# Altium PCB SDR_V2.PcbDoc (part 1 of 2)
Units mil, origin at the board's own origin, x right, y up, seen from the top; angles counter-clockwise.
Board outline 6000 x 4000 mil, 2 copper layers (Top Layer, Bottom Layer); 403 components, 321 nets, 1711 pads, 0 vias.
Unrouted connection lines stored in the file: 1226.
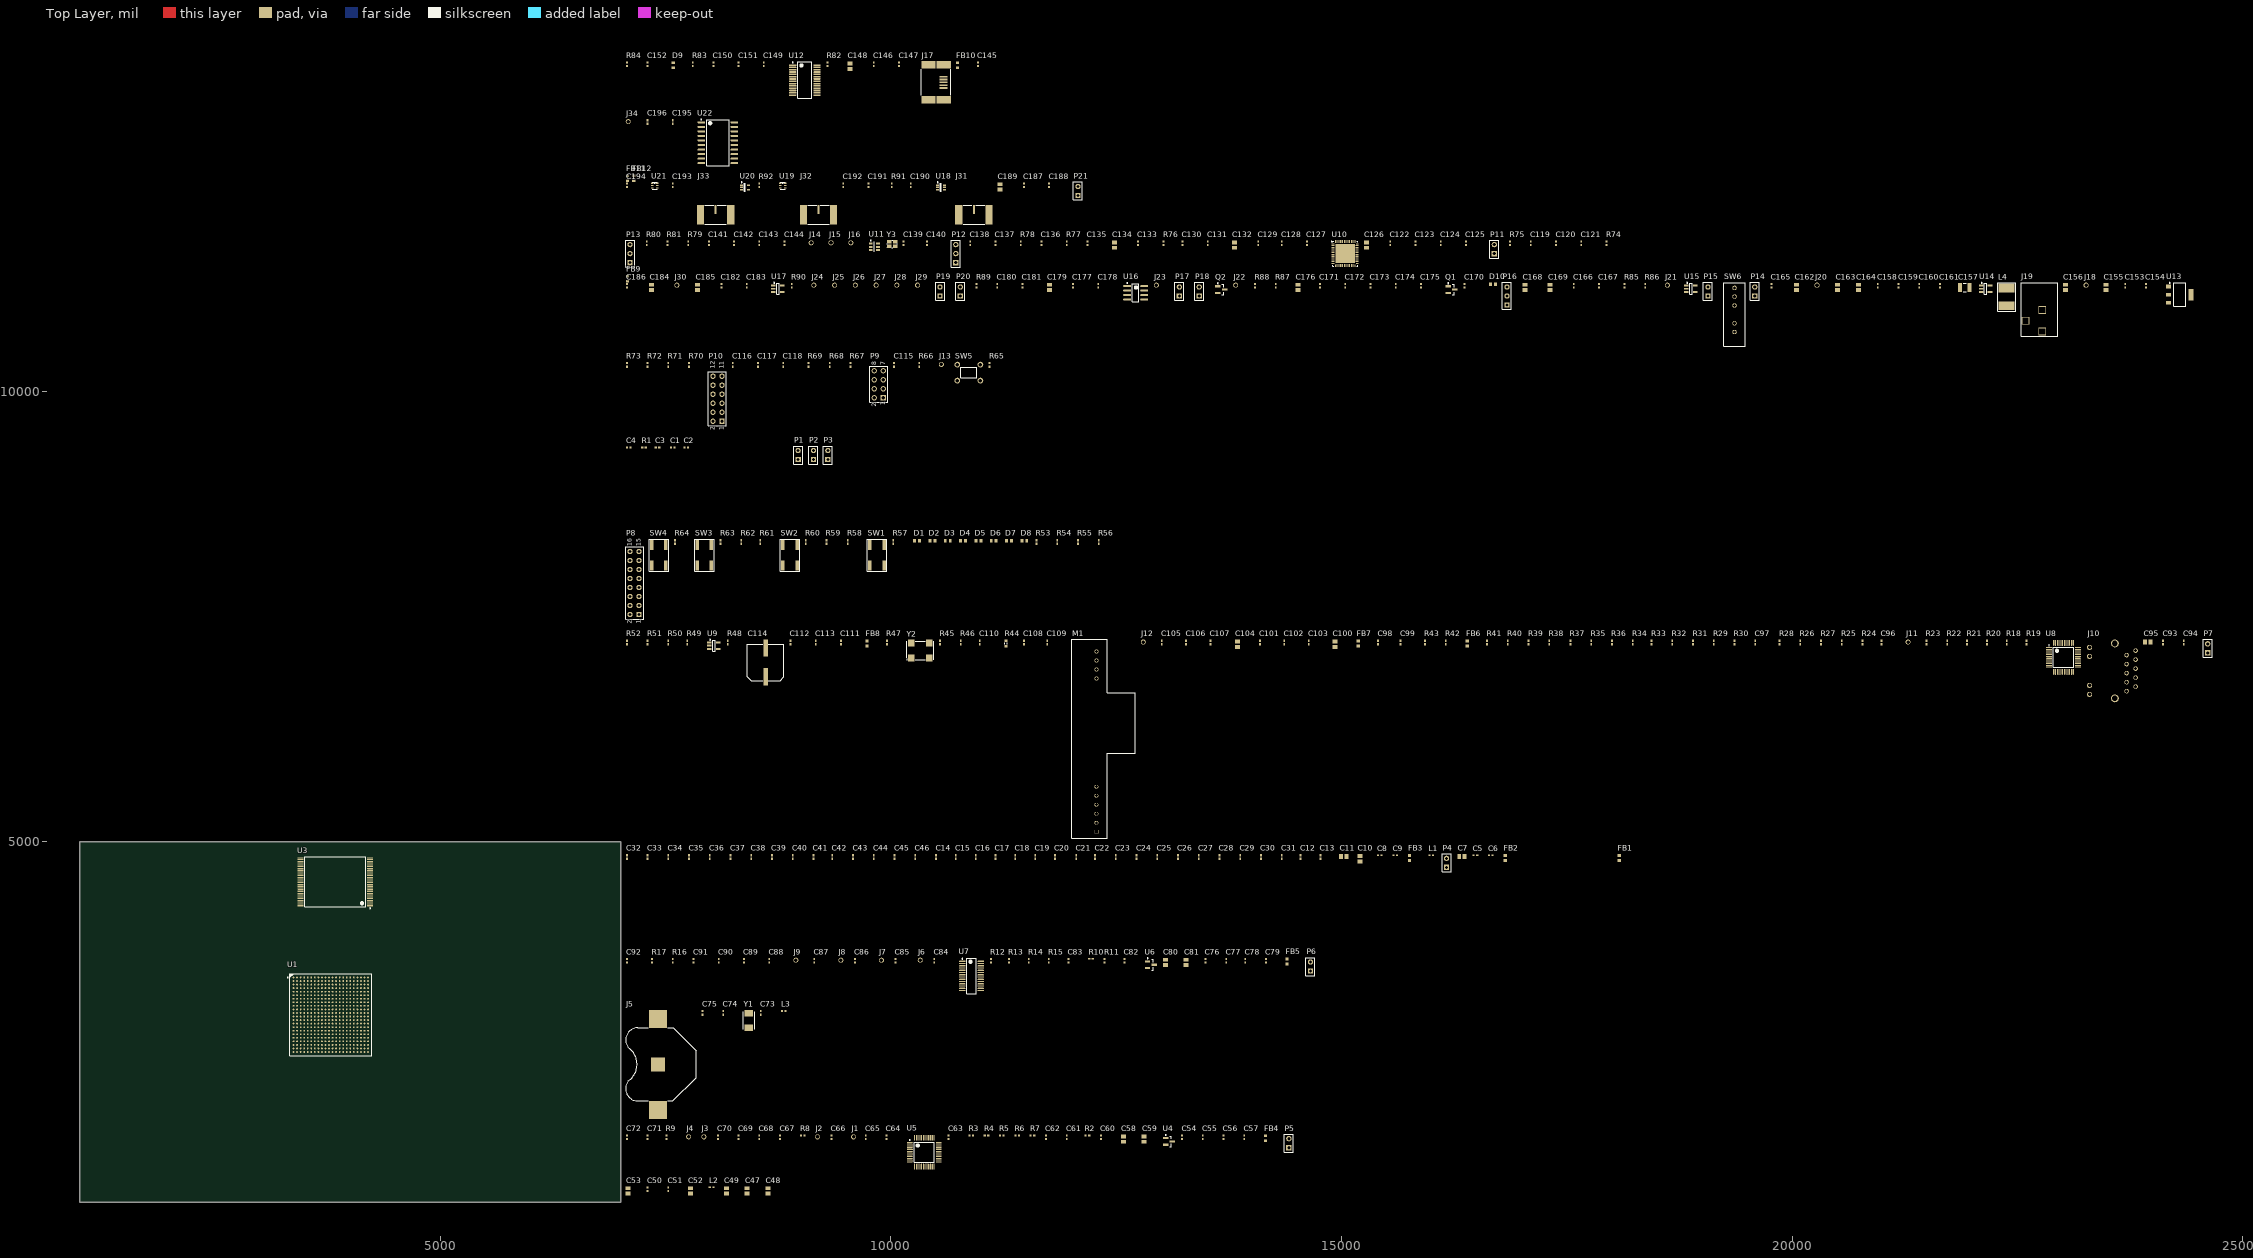
[diagram p0: Top Layer view]
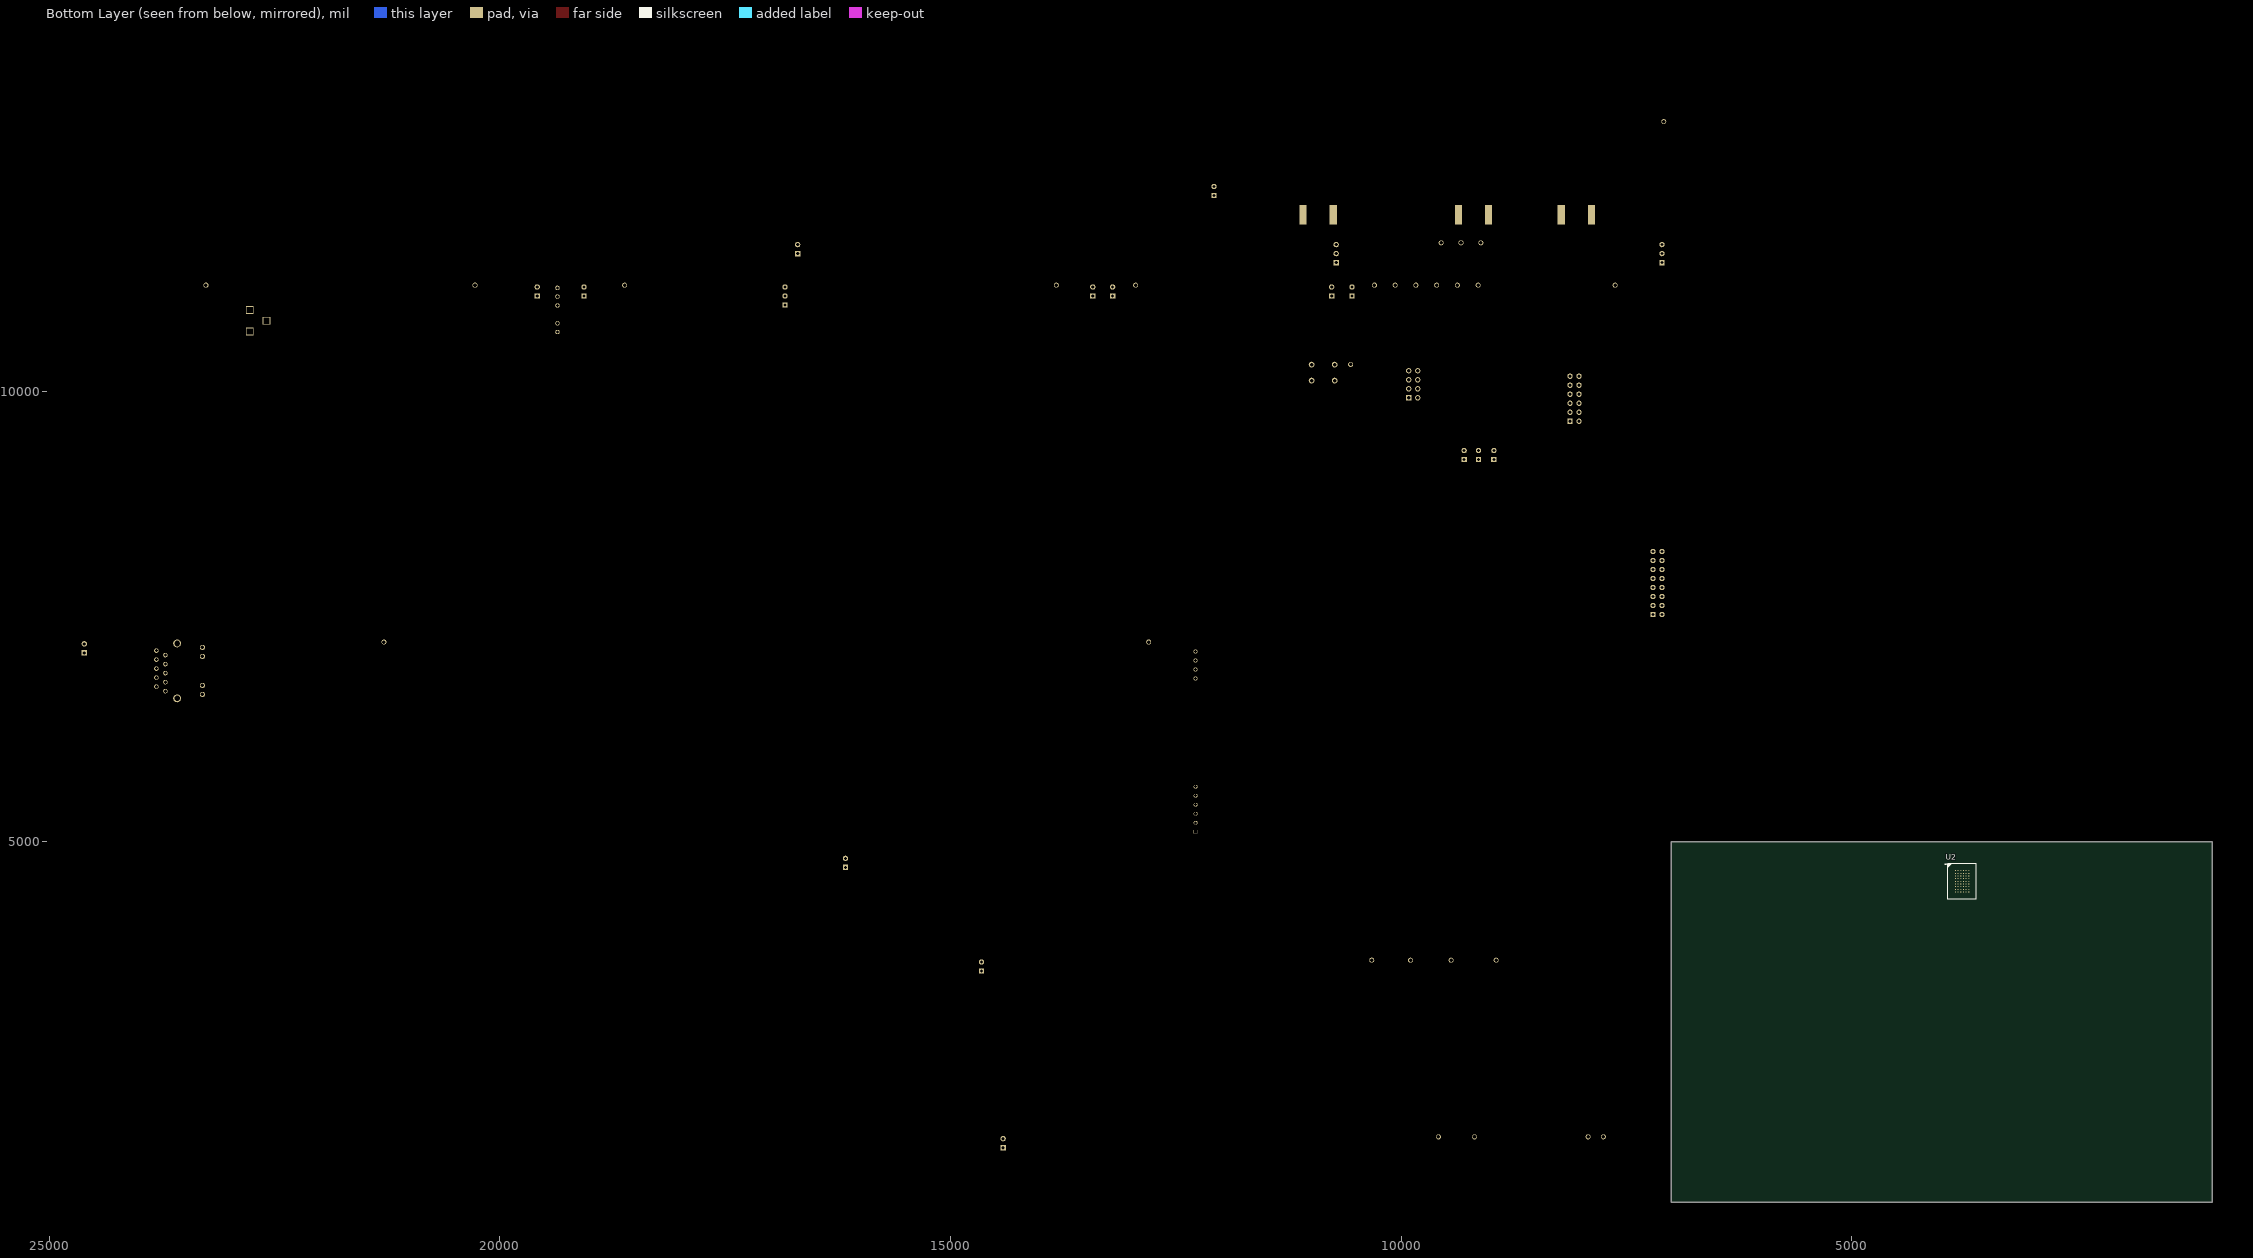
[diagram p1: Bottom Layer view, seen from below]

## Layer stack, top to bottom
Top Layer: signal copper 1.4
Dielectric: dielectric 12.6, FR-4, Dk 4.8
Bottom Layer: signal copper 1.4

## Board outline
1000,1000 7000,1000 7000,5000 1000,5000

## Design rules (kind name [scope] priority, off if disabled: settings)
Clearance [All] p1: gap=10
DiffPairsRouting [All] p1: maxlimit=10 minlimit=10 mostfreqgap=10 maxuncoupledlength=500
PolygonConnect [All] p1: connectstyle=Relief reliefconductorwidth=10 reliefentries=4 polygonreliefangle="90 Angle"
RoomDefinition U_usb_uart [InComponentClass('U_usb_uart')] p1: confinementstyle=ConfineIn formatcopy=TRUE lockcomponents=FALSE outline 7045,13180 11185,13180 11185,13770 7045,13770
RoomDefinition U_RTC [InComponentClass('U_RTC')] p2: confinementstyle=ConfineIn formatcopy=TRUE lockcomponents=FALSE outline 7045,12480 8325,12480 8325,13130 7045,13130
RoomDefinition U_RF_2 [InComponentClass('U_RF_2')] p3: confinementstyle=ConfineIn formatcopy=TRUE lockcomponents=FALSE outline 7045,11835 12210,11835 12210,12430 7045,12430
RoomDefinition U_RF [InComponentClass('U_RF')] p4: confinementstyle=ConfineIn formatcopy=TRUE lockcomponents=FALSE outline 7045,11365 18110,11365 18110,11785 7045,11785
RoomDefinition U_PWR_Gen [InComponentClass('U_PWR_Gen')] p5: confinementstyle=ConfineIn formatcopy=TRUE lockcomponents=FALSE outline 7045,10485 24465,10485 24465,11315 7045,11315
RoomDefinition U_MSS_IO [InComponentClass('U_MSS_IO')] p6: confinementstyle=ConfineIn formatcopy=TRUE lockcomponents=FALSE outline 7045,9550 11265,9550 11265,10435 7045,10435
RoomDefinition U_MEM [InComponentClass('U_MEM')] p7: confinementstyle=ConfineIn formatcopy=TRUE lockcomponents=FALSE outline 7045,8520 9375,8520 9375,9500 7045,9500
RoomDefinition U_Fabric_IO [InComponentClass('U_Fabric_IO')] p8: confinementstyle=ConfineIn formatcopy=TRUE lockcomponents=FALSE outline 7045,7405 12475,7405 12475,8470 7045,8470
RoomDefinition U_Ethernet [InComponentClass('U_Ethernet')] p9: confinementstyle=ConfineIn formatcopy=TRUE lockcomponents=FALSE outline 7045,5025 24735,5025 24735,7355 7045,7355
RoomDefinition U_Digital_PWR [InComponentClass('U_Digital_PWR')] p10: confinementstyle=ConfineIn formatcopy=TRUE lockcomponents=FALSE outline 7045,3875 18225,3875 18225,4975 7045,4975
RoomDefinition U_DAC [InComponentClass('U_DAC')] p11: confinementstyle=ConfineIn formatcopy=TRUE lockcomponents=FALSE outline 7045,3295 14730,3295 14730,3825 7045,3825
RoomDefinition U_Analog [InComponentClass('U_Analog')] p12: confinementstyle=ConfineIn formatcopy=TRUE lockcomponents=FALSE outline 7045,1915 9935,1915 9935,3245 7045,3245
RoomDefinition U_ADC [InComponentClass('U_ADC')] p13: confinementstyle=ConfineIn formatcopy=TRUE lockcomponents=FALSE outline 7045,1345 14490,1345 14490,1865 7045,1865
RoomDefinition U_ACE [InComponentClass('U_ACE')] p14: confinementstyle=ConfineIn formatcopy=TRUE lockcomponents=FALSE outline 7045,1060 8790,1060 8790,1290 7045,1290
RoutingVias [All] p1: holewidth=28 width=50 viastyle="Through Hole" minholewidth=28 minwidth=50 maxholewidth=28 maxwidth=50
SilkscreenOverComponentPads [All] p1: minsilkscreentomaskgap=10
SolderMaskExpansion [All] p1: expansion=4
Width [All] p1: maxlimit=10 minlimit=10 preferedwidth=10
26 further rules are at their usual default settings.

## Classes and differential pairs
component class U_ACE: C47 C48 C49 C51 C52 C53 C76 L2
component class U_ADC: C47 C48 C55 C56 C57 C61 C80 C81 C114 C141 C142 C143 C156 C157 C158 C159 C160 C161 C162 FB4 J1 J2 J3 J4 P5 R2 R3 R4 R5 R6 R7 R8 R9 U5
component class U_Analog: C47 C48 C49 J13 L2 Y1
component class U_DAC: C51 C52 C53 C61 C76 C80 C84 C88 C92 C114 C141 C143 C156 C157 C159 C160 C161 FB6 J7 J8 J9 J17 P1 R10 R11 R12 R13 R14 R15 R16 R20 U9 U13
component class U_Digital_PWR: C5 C6 C7 C8 C9 C10 C11 C12 C13 C14 C15 C16 C17 C18 C19 C20 C21 C22 C23 C24 C25 C26 C27 C28 C29 C30 C31 C32 C33 C34 C35 C36 C37 C38 C39 C40 C41 C42 C43 C44 C45 C46 FB1 FB2 FB3 L1 P4 U1
component class U_Ethernet: C47 C48 C49 C62 C84 C88 C92 C99 C103 C107 C109 C110 C111 C112 C113 C114 C143 C156 C159 C160 C163 C164 FB6 FB7 FB8 J9 J11 J12 M1 P7 R18 R19 R20 R21 R22 R23 R24 R25 R26 R27 R28 R29 R30 R31 R32 R33 R34 R35 R36 R37 R38 R39 R40 R41 R43 R46 R47 R51 R52 R55 R59 R60 R61 R64 R67 U9 Y2
component class U_Fabric_IO: D2 D3 D4 D5 D6 D7 D8 D10 P8 R9 R53 R55 R59 R60 R61 R63 R64 R65 R67 R68 R70 SW1 SW2 SW3 SW4
component class U_MEM: C1 C2 C3 C4 P2 P3 P8 R1 U2 U3
component class U_MSS_IO: C88 C103 C115 C159 J13 P7 P9 R9 R52 R65 R67 R68 R70 R71 R80 R83 SW5
component class U_PWR_Gen: C122 C123 C139 C141 C142 C143 C156 C157 C158 C159 C160 C161 C162 C163 C164 C166 C167 C168 C169 C170 C171 C172 C173 C174 C175 C176 C177 C178 C179 C180 C181 C183 C184 C187 D10 FB6 FB10 J18 J19 J20 J21 J22 J23 J24 J25 J26 J27 J28 J29 J30 L2 P14 P15 P16 P17 P18 P19 P20 Q1 Q2 R85 R86 R87 R88 R89 R90 SW6 U9 U13 U15 U16 U17
component class U_RF_2: C126 C187 C188 C190 C191 C192 C193 C194 FB11 FB12 J31 J32 J33 P11 R91 R92 U12 U18 U20 U21
component class U_RF: C92 C99 C103 C107 C111 C115 C119 C122 C123 C126 C127 C130 C131 C132 C133 C135 C136 C137 C138 C139 C140 C141 C142 C143 C144 C172 FB11 FB12 J13 J15 J16 P12 P13 P15 R20 R46 R74 R76 R79 R80 R83 R84 U13 U15 Y2
component class U_RTC: C195 C196 J34 U21
component class U_usb_uart: C119 C135 C139 C140 C145 C146 C149 C150 D8 FB10 J17 R59 R83 R84 U12
net class ADC_A[0..7]: ADC_A0 ADC_A1 ADC_A2 ADC_A3 ADC_A4 ADC_A5 ADC_A6 ADC_A7
net class ADC_B[0..7]: ADC_B0 ADC_B1 ADC_B2 ADC_B3 ADC_B4 ADC_B5 ADC_B6 ADC_B7
net class B[1..7]: B1 B2 B3 B4 B5 B6 B7
net class DAC_D[0..7]: DAC_D0 DAC_D1 DAC_D2 DAC_D3 DAC_D4 DAC_D5 DAC_D6 DAC_D7
net class EMC_AB[23..1]: EMC_AB1 EMC_AB2 EMC_AB3 EMC_AB4 EMC_AB5 EMC_AB6 EMC_AB7 EMC_AB8 EMC_AB9 EMC_AB10 EMC_AB11 EMC_AB12 EMC_AB13 EMC_AB14 EMC_AB15 EMC_AB16 EMC_AB17 EMC_AB18 EMC_AB19 EMC_AB20 EMC_AB21 EMC_AB22 EMC_AB23
net class EMC_DB[15..0]: EMC_DB0 EMC_DB1 EMC_DB2 EMC_DB3 EMC_DB4 EMC_DB5 EMC_DB6 EMC_DB7 EMC_DB8 EMC_DB9 EMC_DB10 EMC_DB11 EMC_DB12 EMC_DB13 EMC_DB14 EMC_DB15
differential pair ADC_RX_I_BIAS: +ADC_RX_I_BIAS_P -ADC_RX_I_BIAS_N
differential pair ADC_RX_I: +ADC_RX_I_P -ADC_RX_I_N
differential pair ADC_RX_Q_BIAS: +ADC_RX_Q_BIAS_P -ADC_RX_Q_BIAS_N
differential pair ADC_RX_Q: +ADC_RX_Q_P -ADC_RX_Q_N
differential pair RD: +RD_P -RD_N
differential pair RF_TX_I_BIAS: +RF_TX_I_BIAS_P -RF_TX_I_BIAS_N
differential pair RF_TX_I: +RF_TX_I_P -RF_TX_I_N
differential pair RF_TX_Q_BIAS: +RF_TX_Q_BIAS_P -RF_TX_Q_BIAS_N
differential pair RF_TX_Q: +RF_TX_Q_P -RF_TX_Q_N
differential pair RXRF: +RXRF_P -RXRF_N
differential pair TD: +TD_P -TD_N
differential pair TXRF_C: +TXRF_C_P -TXRF_C_N
differential pair TXRF: +TXRF_P -TXRF_N
differential pair USB_D: +USB_D_P -USB_D_N

## Components (designator, comment, footprint, x,y, rotation, side; value= is the part's Value field where it differs from the comment)
C1 "Cap Semi" 0402 7580,9375 r0 top
C2 "Cap Semi" 0402 7730,9375 r0 top
C3 "Cap Semi" 0402 7410,9375 r0 top
C4 "Cap Semi" 0402 7090,9375 r0 top
C5 "Cap Semi" 0402 16485,4850 r0 top
C6 "Cap Semi" 0402 16655,4850 r0 top
C7 "Cap Pol3" C0805 16335,4835 r0 top
C8 "Cap Semi" 0402 15425,4850 r0 top
C9 "Cap Semi" 0402 15595,4850 r0 top
C10 "Cap Pol3" C0805 15205,4810 r90 top
C11 "Cap Pol3" C0805 15025,4835 r0 top
C12 "Cap Semi" 0402 14545,4830 r90 top
C13 "Cap Semi" 0402 14765,4830 r90 top
C14 "Cap Semi" 0402 10500,4830 r90 top
C15 "Cap Semi" 0402 10720,4830 r90 top
C16 "Cap Semi" 0402 10940,4830 r90 top
C17 "Cap Semi" 0402 11160,4830 r90 top
C18 "Cap Semi" 0402 11380,4830 r90 top
C19 "Cap Semi" 0402 11600,4830 r90 top
C20 "Cap Semi" 0402 11820,4830 r90 top
C21 "Cap Semi" 0402 12055,4830 r90 top
C22 "Cap Semi" 0402 12265,4830 r90 top
C23 "Cap Semi" 0402 12495,4830 r90 top
C24 "Cap Semi" 0402 12725,4830 r90 top
C25 "Cap Semi" 0402 12955,4830 r90 top
C26 "Cap Semi" 0402 13185,4830 r90 top
C27 "Cap Semi" 0402 13415,4830 r90 top
C28 "Cap Semi" 0402 13645,4830 r90 top
C29 "Cap Semi" 0402 13875,4830 r90 top
C30 "Cap Semi" 0402 14105,4830 r90 top
C31 "Cap Semi" 0402 14335,4830 r90 top
C32 "Cap Semi" 0402 7070,4830 r90 top
C33 "Cap Semi" 0402 7300,4830 r90 top
C34 "Cap Semi" 0402 7530,4830 r90 top
C35 "Cap Semi" 0402 7760,4830 r90 top
C36 "Cap Semi" 0402 7990,4830 r90 top
C37 "Cap Semi" 0402 8220,4830 r90 top
C38 "Cap Semi" 0402 8450,4830 r90 top
C39 "Cap Semi" 0402 8680,4830 r90 top
C40 "Cap Semi" 0402 8910,4830 r90 top
C41 "Cap Semi" 0402 9140,4830 r90 top
C42 "Cap Semi" 0402 9350,4830 r90 top
C43 "Cap Semi" 0402 9580,4830 r90 top
C44 "Cap Semi" 0402 9810,4830 r90 top
C45 "Cap Semi" 0402 10040,4830 r90 top
C46 "Cap Semi" 0402 10270,4830 r90 top
C47 "Cap Pol3" C0805 8405,1125 r90 top
C48 "Cap Pol3" C0805 8635,1125 r90 top
C49 "Cap Pol3" C0805 8175,1125 r90 top
C50 "Cap Semi" 0402 7300,1145 r90 top
C51 "Cap Semi" 0402 7530,1145 r90 top
C52 "Cap Pol3" C0805 7775,1125 r90 top
C53 "Cap Pol3" C0805 7085,1125 r90 top
C54 "Cap Semi" 0402 13230,1720 r90 top
C55 "Cap Semi" 0402 13460,1720 r90 top
C56 "Cap Semi" 0402 13690,1720 r90 top
C57 "Cap Semi" 0402 13920,1720 r90 top
C58 "Cap Pol3" C0805 12580,1700 r90 top
C59 "Cap Pol3" C0805 12810,1700 r90 top
C60 "Cap Semi" 0402 12330,1720 r90 top
C61 "Cap Semi" 0402 11950,1720 r90 top
C62 "Cap Semi" 0402 11720,1720 r90 top
C63 "Cap Semi" 0402 10640,1720 r90 top
C64 "Cap Semi" 0402 9950,1720 r90 top
C65 "Cap Semi" 0402 9720,1720 r90 top
C66 "Cap Semi" 0402 9340,1720 r90 top
C67 "Cap Semi" 0402 8770,1720 r90 top
C68 "Cap Semi" 0402 8540,1720 r90 top
C69 "Cap Semi" 0402 8310,1720 r90 top
C70 "Cap Semi" 0402 8080,1720 r90 top
C71 "Cap Semi" 0402 7300,1720 r90 top
C72 "Cap Semi" 0402 7070,1720 r90 top
C73 "Cap Semi" 0402 8555,3100 r90 top
C74 "Cap Semi" 0402 8140,3100 r90 top
C75 "Cap Semi" 0402 7910,3100 r90 top
C76 "Cap Semi" 0402 13490,3680 r90 top
C77 "Cap Semi" 0402 13720,3680 r90 top
C78 "Cap Semi" 0402 13930,3680 r90 top
C79 "Cap Semi" 0402 14160,3680 r90 top
C80 "Cap Pol3" C0805 13045,3660 r90 top
C81 "Cap Pol3" C0805 13275,3660 r90 top
C82 "Cap Semi" 0402 12590,3680 r90 top
C83 "Cap Semi" 0402 11970,3680 r90 top
C84 "Cap Semi" 0402 10480,3680 r90 top
C85 "Cap Semi" 0402 10050,3680 r90 top
C86 "Cap Semi" 0402 9600,3680 r90 top
C87 "Cap Semi" 0402 9150,3680 r90 top
C88 "Cap Semi" 0402 8650,3680 r90 top
C89 "Cap Semi" 0402 8370,3680 r90 top
C90 "Cap Semi" 0402 8090,3680 r90 top
C91 "Cap Semi" 0402 7810,3680 r90 top
C92 "Cap Semi" 0402 7070,3680 r90 top
C93 "Cap Semi" 0402 24115,7210 r90 top
C94 "Cap Semi" 0402 24345,7210 r90 top
C95 "Cap Pol3" C0805 23945,7215 r0 top
C96 "Cap Semi" 0402 20990,7210 r90 top
C97 "Cap Semi" 0402 19590,7210 r90 top
C98 "Cap Semi" 0402 15405,7210 r90 top
C99 "Cap Semi" 0402 15655,7210 r90 top
C100 "Cap Pol3" C0805 14925,7190 r90 top
C101 "Cap Semi" 0402 14095,7210 r90 top
C102 "Cap Semi" 0402 14365,7210 r90 top
C103 "Cap Semi" 0402 14635,7210 r90 top
C104 "Cap Pol3" C0805 13845,7190 r90 top
C105 "Cap Semi" 0402 13005,7210 r90 top
C106 "Cap Semi" 0402 13275,7210 r90 top
C107 "Cap Semi" 0402 13545,7210 r90 top
C108 "Cap Semi" 0402 11475,7210 r90 top
C109 "Cap Semi" 0402 11735,7210 r90 top
C110 "Cap Semi" 0402 10985,7210 r90 top
C111 "Cap Semi" 0402 9445,7210 r90 top
C112 "Cap Semi" 0402 8885,7210 r90 top
C113 "Cap Semi" 0402 9165,7210 r90 top
C114 "Cap" "SMT Al Cap." 8610,6990 r0 top
C115 "Cap Semi" 0402 10035,10290 r90 top
C116 "Cap Semi" 0402 8245,10290 r90 top
C117 "Cap Semi" 0402 8525,10290 r90 top
C118 "Cap Semi" 0402 8805,10290 r90 top
C119 "Cap Semi" 0402 17100,11640 r90 top
C120 "Cap Semi" 0402 17380,11640 r90 top
C121 "Cap Semi" 0402 17660,11640 r90 top
C122 "Cap Semi" 0402 15540,11640 r90 top
C123 "Cap Semi" 0402 15820,11640 r90 top
C124 "Cap Semi" 0402 16100,11640 r90 top
C125 "Cap Semi" 0402 16380,11640 r90 top
C126 "Cap Pol3" C0805 15275,11620 r90 top
C127 "Cap Semi" 0402 14615,11640 r90 top
C128 "Cap Semi" 0402 14335,11640 r90 top
C129 "Cap Semi" 0402 14075,11640 r90 top
C130 "Cap Semi" 0402 13235,11640 r90 top
C131 "Cap Semi" 0402 13515,11640 r90 top
C132 "Cap Pol3" C0805 13810,11620 r90 top
C133 "Cap Semi" 0402 12740,11640 r90 top
C134 "Cap Pol3" C0805 12480,11620 r90 top
C135 "Cap Semi" 0402 12180,11640 r90 top
C136 "Cap Semi" 0402 11670,11640 r90 top
C137 "Cap Semi" 0402 11160,11640 r90 top
C138 "Cap Semi" 0402 10880,11640 r90 top
C139 "Cap Semi" 0402 10140,11640 r90 top
C140 "Cap Semi" 0402 10400,11640 r90 top
C141 "Cap Semi" 0402 7980,11640 r90 top
C142 "Cap Semi" 0402 8260,11640 r90 top
C143 "Cap Semi" 0402 8540,11640 r90 top
C144 "Cap Semi" 0402 8820,11640 r90 top
C145 "Cap Semi" 0402 10965,13625 r90 top
C146 "Cap Semi" 0402 9810,13625 r90 top
C147 "Cap Semi" 0402 10090,13625 r90 top
C148 "Cap Pol3" C0805 9545,13605 r90 top
C149 "Cap Semi" 0402 8590,13625 r90 top
C150 "Cap Semi" 0402 8030,13625 r90 top
C151 "Cap Semi" 0402 8310,13625 r90 top
C152 "Cap Semi" 0402 7300,13625 r90 top
C153 "Cap Semi" 0402 23695,11170 r90 top
C154 "Cap Semi" 0402 23925,11170 r90 top
C155 "Cap Pol3" C0805 23480,11150 r90 top
C156 "Cap Pol3" C0805 23030,11150 r90 top
C157 "Cap Semi" C1210 21915,11150 r0 top
C158 "Cap Semi" 0402 20950,11170 r90 top
C159 "Cap Semi" 0402 21180,11170 r90 top
C160 "Cap Semi" 0402 21410,11170 r90 top
C161 "Cap Semi" 0402 21640,11170 r90 top
C162 "Cap Pol3" C0805 20050,11150 r90 top
C163 "Cap Pol3" C0805 20505,11150 r90 top
C164 "Cap Pol3" C0805 20735,11150 r90 top
C165 "Cap Semi" 0402 19770,11170 r90 top
C166 "Cap Semi" 0402 17575,11170 r90 top
C167 "Cap Semi" 0402 17855,11170 r90 top
C168 "Cap Pol3" C0805 17035,11150 r90 top
C169 "Cap Pol3" C0805 17315,11150 r90 top
C170 "Cap Semi" 0402 16365,11170 r90 top
C171 "Cap Semi" 0402 14760,11170 r90 top
C172 "Cap Semi" 0402 15040,11170 r90 top
C173 "Cap Semi" 0402 15320,11170 r90 top
C174 "Cap Semi" 0402 15600,11170 r90 top
C175 "Cap Semi" 0402 15880,11170 r90 top
C176 "Cap Pol3" C0805 14515,11150 r90 top
C177 "Cap Semi" 0402 12020,11170 r90 top
C178 "Cap Semi" 0402 12300,11170 r90 top
C179 "Cap Pol3" C0805 11760,11150 r90 top
C180 "Cap Semi" 0402 11180,11170 r90 top
C181 "Cap Semi" 0402 11460,11170 r90 top
C182 "Cap Semi" 0402 8120,11170 r90 top
C183 "Cap Semi" 0402 8400,11170 r90 top
C184 "Cap Pol3" C0805 7345,11150 r90 top
C185 "Cap Pol3" C0805 7855,11150 r90 top
C186 "Cap Semi" 0402 7070,11170 r90 top
C187 "Cap Semi" 0402 11475,12285 r90 top
C188 "Cap Semi" 0402 11755,12285 r90 top
C189 "Cap Pol3" C0805 11210,12265 r90 top
C190 "Cap Semi" 0402 10220,12285 r90 top
C191 "Cap Semi" 0402 9750,12285 r90 top
C192 "Cap Semi" 0402 9470,12285 r90 top
C193 "Cap Semi" 0402 7580,12285 r90 top
C194 "Cap Semi" 0402 7070,12285 r90 top
C195 "Cap Semi" 0402 7580,12985 r90 top
C196 "Cap Semi" 0402 7300,12985 r90 top
D1 "LED2" 1608[0603] 10290,8340 r0 top
D2 "LED2" 1608[0603] 10460,8340 r0 top
D3 "LED2" 1608[0603] 10630,8340 r0 top
D4 "LED2" 1608[0603] 10800,8340 r0 top
D5 "LED2" 1608[0603] 10970,8340 r0 top
D6 "LED2" 1608[0603] 11140,8340 r0 top
D7 "LED2" 1608[0603] 11310,8340 r0 top
D8 "LED2" 1608[0603] 11480,8340 r0 top
D9 "LED2" 1608[0603] 7585,13615 r90 top
D10 "LED2" 1608[0603] 16680,11185 r0 top
FB1 "BLM18PG300SN1D" 1608[0603] 18080,4820 r90 top
FB2 "BLM18PG300SN1D" 1608[0603] 16815,4820 r90 top
FB3 "BLM18PG300SN1D" 1608[0603] 15755,4820 r90 top
FB4 "BLM18PG300SN1D" 1608[0603] 14155,1710 r90 top
FB5 "BLM18PG300SN1D" 1608[0603] 14395,3670 r90 top
FB6 "BLM18PG300SN1D" 1608[0603] 16395,7200 r90 top
FB7 "BLM18PG300SN1D" 1608[0603] 15185,7200 r90 top
FB8 "BLM18PG300SN1D" 1608[0603] 9735,7200 r90 top
FB9 "BLM18PG300SN1D" 1608[0603] 7078.62,11245.79 r90 top
FB10 "BLM18PG300SN1D" 1608[0603] 10740,13615 r90 top
FB11 "BLM18PG300SN1D" 1608[0603] 7078.62,12360.79 r90 top
FB12 "BLM18PG300SN1D" 1608[0603] 7145.87,12360.79 r90 top
J1 "5004" TestPoint 9585,1725 r0 top
J2 "5004" TestPoint 9185,1725 r0 top
J3 "5004" TestPoint 7925,1725 r0 top
J4 "5004" TestPoint 7755,1725 r0 top
J5 "3002TR" 3002TR 7415,2530 r90 top
J6 "5004" TestPoint 10325,3685 r0 top
J7 "5004" TestPoint 9895,3685 r0 top
J8 "5004" TestPoint 9445,3685 r0 top
J9 "5004" TestPoint 8945,3685 r90 top
J10 "7499211121A" 7499211121A 23460,6670 r90 top
J11 "5004" TestPoint 21285,7215 r90 top
J12 "5004" TestPoint 12800,7215 r90 top
J13 "5004" TestPoint 10560,10295 r0 top
J14 "5004" TestPoint 9115,11645 r90 top
J15 "5004" TestPoint 9335,11645 r90 top
J16 "5004" TestPoint 9555,11645 r90 top
J17 "54819-0572" "Mini USB" 10585,13425 r0 top
J18 "5004" TestPoint 23260,11175 r90 top
J19 "PJ-102AH" PJ-102AH 22775,10780 r0 top
J20 "5004" TestPoint 20275,11175 r90 top
J21 "5004" TestPoint 18615,11175 r0 top
J22 "5004" TestPoint 13825,11175 r90 top
J23 "5004" TestPoint 12945,11175 r90 top
J24 "5004" TestPoint 9145,11175 r90 top
J25 "5004" TestPoint 9375,11175 r90 top
J26 "5004" TestPoint 9605,11175 r90 top
J27 "5004" TestPoint 9835,11175 r90 top
J28 "5004" TestPoint 10065,11175 r90 top
J29 "5004" TestPoint 10295,11175 r90 top
J30 "5004" TestPoint 7625,11175 r90 top
J31 "142-0701-851" SMA_SMD 10920,11970 r0 top
J32 "142-0701-851" SMA_SMD 9195,11970 r0 top
J33 "142-0701-851" SMA_SMD 8055,11970 r0 top
J34 "5004" TestPoint 7085,12990 r90 top
L1 "Inductor" 0402 15995,4850 r0 top
L2 "Inductor" 0402 8010,1165 r0 top
L3 "Inductor" 0402 8810,3120 r0 top
L4 "FP3-8R2-R" FLAT-PAC 22380,11045 r0 top
M1 "AG9205S" AG9205S 12280,5110 r90 top
P1 "Header 2" HDR1X2 8970,9240 r90 top
P2 "Header 2" HDR1X2 9140,9240 r90 top
P3 "Header 2" HDR1X2 9300,9240 r90 top
P4 "Header 2" HDR1X2 16165,4715 r90 top
P5 "Header 2" HDR1X2 14415,1605 r90 top
P6 "Header 2" HDR1X2 14655,3565 r90 top
P7 "Header 2" HDR1X2 24610,7095 r90 top
P8 "Header 8X2" HDR2X8 7205,7520 r90 top
P9 "Header 4X2" HDR2X4 9915,9925 r90 top
P10 "Header 6X2" HDR2X6 8125,9665 r90 top
P11 "Header 2" HDR1X2 16695,11525 r90 top
P12 "Header 3" HDR1X3 10720,11425 r90 top
P13 "Header 3" HDR1X3 7105,11425 r90 top
P14 "Header 2" HDR1X2 19585,11055 r90 top
P15 "Header 2" HDR1X2 19065,11055 r90 top
P16 "Header 3" HDR1X3 16835,10955 r90 top
P17 "Header 2" HDR1X2 13200,11055 r90 top
P18 "Header 2" HDR1X2 13420,11055 r90 top
P19 "Header 2" HDR1X2 10545,11055 r90 top
P20 "Header 2" HDR1X2 10770,11055 r90 top
P21 "Header 2" HDR1X2 12075,12170 r90 top
Q1 "MMBT2222A" SOT23-3N 16220,11125 r0 top
Q2 "MMBT2222A" SOT23-3N 13665,11125 r0 top
R1 "Res3" 0402 7260,9375 r0 top
R2 "Res3" 0402 12180,1740 r0 top
R3 "Res3" 0402 10890,1740 r0 top
R4 "Res3" 0402 11060,1740 r0 top
R5 "Res3" 0402 11230,1740 r0 top
R6 "Res3" 0402 11400,1740 r0 top
R7 "Res3" 0402 11570,1740 r0 top
R8 "Res3" 0402 9020,1740 r0 top
R9 "Res3" 0402 7510,1720 r90 top
R10 "Res3" 0402 12220,3700 r0 top
R11 "Res3" 0402 12370,3680 r90 top
R12 "Res3" 0402 11110,3680 r90 top
R13 "Res3" 0402 11310,3680 r90 top
R14 "Res3" 0402 11530,3680 r90 top
R15 "Res3" 0402 11750,3680 r90 top
R16 "Res3" 0402 7580,3680 r90 top
R17 "Res3" 0402 7350,3680 r90 top
R18 "Res3" 0402 22380,7210 r90 top
R19 "Res3" 0402 22600,7210 r90 top
R20 "Res3" 0402 22160,7210 r90 top
R21 "Res3" 0402 21940,7210 r90 top
R22 "Res3" 0402 21720,7210 r90 top
R23 "Res3" 0402 21490,7210 r90 top
R24 "Res3" 0402 20780,7210 r90 top
R25 "Res3" 0402 20550,7210 r90 top
R26 "Res3" 0402 20090,7210 r90 top
R27 "Res3" 0402 20320,7210 r90 top
R28 "Res3" 0402 19860,7210 r90 top
R29 "Res3" 0402 19130,7210 r90 top
R30 "Res3" 0402 19360,7210 r90 top
R31 "Res3" 0402 18900,7210 r90 top
R32 "Res3" 0402 18670,7210 r90 top
R33 "Res3" 0402 18440,7210 r90 top
R34 "Res3" 0402 18230,7210 r90 top
R35 "Res3" 0402 17770,7210 r90 top
R36 "Res3" 0402 18000,7210 r90 top
R37 "Res3" 0402 17540,7210 r90 top
R38 "Res3" 0402 17305,7210 r90 top
R39 "Res3" 0402 17075,7210 r90 top
R40 "Res3" 0402 16845,7210 r90 top
R41 "Res3" 0402 16615,7210 r90 top
R42 "Res3" 0402 16155,7210 r90 top
R43 "Res3" 0402 15925,7210 r90 top
R44 "Res3" J1-0603 11275,7200 r90 top
R45 "Res3" 0402 10545,7210 r90 top
R46 "Res3" 0402 10775,7210 r90 top
R47 "Res3" 0402 9955,7210 r90 top
R48 "Res3" 0402 8190,7210 r90 top
R49 "Res3" 0402 7740,7210 r90 top
R50 "Res3" 0402 7530,7210 r90 top
R51 "Res3" 0402 7300,7210 r90 top
R52 "Res3" 0402 7070,7210 r90 top
R53 "Res3" 0402 11615,8325 r90 top
R54 "Res3" 0402 11845,8325 r90 top
R55 "Res3" 0402 12075,8325 r90 top
R56 "Res3" 0402 12305,8325 r90 top
R57 "Res3" 0402 10025,8325 r90 top
R58 "Res3" 0402 9520,8325 r90 top
R59 "Res3" 0402 9285,8325 r90 top
R60 "Res3" 0402 9055,8325 r90 top
R61 "Res3" 0402 8550,8325 r90 top
R62 "Res3" 0402 8340,8325 r90 top
R63 "Res3" 0402 8110,8325 r90 top
R64 "Res3" 0402 7605,8325 r90 top
R65 "Res3" 0402 11095,10290 r90 top
R66 "Res3" 0402 10315,10290 r90 top
R67 "Res3" 0402 9550,10290 r90 top
R68 "Res3" 0402 9320,10290 r90 top
R69 "Res3" 0402 9085,10290 r90 top
R70 "Res3" 0402 7760,10290 r90 top
R71 "Res3" 0402 7530,10290 r90 top
R72 "Res3" 0402 7300,10290 r90 top
R73 "Res3" 0402 7070,10290 r90 top
R74 "Res3" 0402 17940,11640 r90 top
R75 "Res3" 0402 16870,11640 r90 top
R76 "Res3" 0402 13025,11640 r90 top
R77 "Res3" 0402 11950,11640 r90 top
R78 "Res3" 0402 11440,11640 r90 top
R79 "Res3" 0402 7750,11640 r90 top
R80 "Res3" 0402 7290,11640 r90 top
R81 "Res3" 0402 7520,11640 r90 top
R82 "Res3" 0402 9295,13625 r90 top
R83 "Res3" 0402 7800,13625 r90 top
R84 "Res3" 0402 7070,13625 r90 top
R85 "Res3" 0402 18140,11170 r90 top
R86 "Res3" 0402 18370,11170 r90 top
R87 "Res3" 0402 14270,11170 r90 top
R88 "Res3" 0402 14040,11170 r90 top
R89 "Res3" 0402 10950,11170 r90 top
R90 "Res3" 0402 8900,11170 r90 top
R91 "Res3" 0402 10010,12285 r90 top
R92 "Res3" 0402 8540,12285 r90 top
SW1 "Switch 4-lead" KSC403 9845,8180 r90 top
SW2 "Switch 4-lead" KSC403 8880,8180 r90 top
SW3 "Switch 4-lead" KSC403 7930,8180 r90 top
SW4 "Switch 4-lead" KSC403 7425,8180 r90 top
SW5 "Switch 4-lead" "EVQPA PB" 10865,10205 r0 top
SW6 "STS1400PC04" STS1400PC04 19360,10655 r90 top
U1 "A2F500M3G-FGG484" BGA100P22X22-484N 3785,3080 r0 top
U2 "MT45W8MW16BGX-701 IT TR" BGA54C75P9X6_1000X800X70 3775,4560 r180 bottom
U3 "S29GL064N90TFI010" TSSOP50P2000X120-56N 3835,4555 r180 top
U4 "MAX6061AEUR+T" SOT23-3N 13085,1675 r0 top
U5 "AD9288BSTZ-100" TSQFP50P900X900X160-48N 10370,1555 r0 top
U6 "MAX6061AEUR+T" SOT23-3N 12885,3635 r0 top
U7 "MAX5189BEEI+" SOP63P600X173-28N 10895,3510 r0 top
U8 "KSZ8721CL" TSQFP50P900X900X160-48N 23010,7045 r0 top
U9 "SN74LVC1G04DBVR" SOT23-5 8035,7175 r0 top
U10 "MAX2831ETM+" TQFN-48 15040,11525 r0 top
U11 "ADC081S101" SOT23-6 9815,11600 r0 top
U12 "FT232RL" SSOP65P780X200-28N 9045,13450 r0 top
U13 "LT1117CST-3.3#PBF" SOT223-4L 24300,11070 r0 top
U14 "TPS78918DBVR" SOT23-5 22145,11135 r0 top
U15 "TPS73115DBVT" SOT23-5 18875,11135 r0 top
U16 "TL7702AIDR" SOIC127P600X175-8N 12715,11090 r0 top
U17 "REG102NA-2.85/250" SOT23-5 8745,11135 r0 top
U18 "AS213-92LF" SOT363-6N 10555,12260 r0 top
U19 "HHM1520A2" HHM1520A2 8800,12280 r0 top
U20 "74AUP1GU04" SOT353-5N 8380,12260 r0 top
U21 "HHM1520A2" HHM1520A2 7380,12280 r0 top
U22 "PCF2127A" SOIC127P1030X265-20N 8080,12755 r0 top
Y1 "ABM3-20.000MHZ-B2-T" ABM3 8425,3015 r90 top
Y2 "CB3LV-3C-50M0000" CB3_CB3LV 10325,7120 r0 top
Y3 "CX2520SB40000H0DZF08" CX-2520SB 10015,11630 r0 top

## Footprints (in the part's own frame and the unit in brackets; to place one, negate y for a bottom-side part, rotate by r counter-clockwise, add the part's x,y. Pads: shape width x height; smd on the part's side, far side on the other; paste and mask are expansions set on the pad)
0402 [mm] "Chip Capacitor, Body 1.0x0.5mm, IPC High Density"
  rect 0.6x0.5 smd: 1(-0.5,0) 2(0.5,0)
  body extent -0.55,-0.3 0.55,0.3, height 1.3
1608[0603] [mm] "Chip Capacitor, Body 1.6x0.8mm, IPC High Density"
  rect 0.8x0.9 smd: 1(-0.7,0) 2(0.7,0)
  body extent -0.87,-0.48 0.87,0.48, height 1.3
3002TR [mm] "Coin battery holder 20mm (dia)"
  rect 3.96x3.96 smd: neg(0,0)
  rect 5.08x5.08 smd: pos(-12.825,0) pos(12.825,0)
  silkscreen extent -10.29,-10.75 10.29,9.12
7499211121A [mm] "RJ45 PoE"
  round 1.25 hole 0.9: 1(11.43,-8.89) 2(10.16,-6.35) 3(8.89,-8.89) 4(7.62,-6.35) 5(6.35,-8.89) 6(5.08,-6.35) 7(3.81,-8.89) 8(2.54,-6.35) 9(1.27,-8.89) 10(0,-6.35)
  round 1.45 hole 1.02: 11(12.345,4.08) 12(9.805,4.08) 13(1.625,4.08) 14(-0.915,4.08)
  round 2.2 hole 1.6: 15(13.46,-3.05) 16(-2.03,-3.05)
  round 0 hole 3.25: ""(0,0) ""(11.43,0)
ABM3 [mm] "ABM3 Crystal"
  rect 1.9x2.4 smd: 1(-2.05,0) 2(2.05,0)
  silkscreen extent -2.5,-1.6 2.5,1.6, body extent -2.75,-1.38 2.75,1.38, height 1.5
AG9205S [mm] "AG9205S 5V POE"
  rect 1.1x1.1 hole 0.85 square: 1(0,0)
  round 1.1 hole 0.85: 2(2.54,0) 3(5.08,0) 4(7.62,0) 5(10.16,0) 6(12.7,0) 7(43.18,0) 8(45.72,0) 9(48.26,0) 10(50.8,0)
  silkscreen extent -1.8,-11 54.2,7
BGA54C75P9X6_1000X800X70 [mm] "BGA, 54-Leads, Body 10.0x8.0mm,  Pitch 0.75mm"
  round 0.3 smd: A1(-1.875,3) A2(-1.125,3) A3(-0.375,3) A4(0.375,3) A5(1.125,3) A6(1.875,3) B1(-1.875,2.25) B2(-1.125,2.25) B3(-0.375,2.25) B4(0.375,2.25) B5(1.125,2.25) B6(1.875,2.25) C1(-1.875,1.5) C2(-1.125,1.5) C3(-0.375,1.5) C4(0.375,1.5) C5(1.125,1.5) C6(1.875,1.5) D1(-1.875,0.75) D2(-1.125,0.75) D3(-0.375,0.75) D4(0.375,0.75) D5(1.125,0.75) D6(1.875,0.75) E1(-1.875,0) E2(-1.125,0) E3(-0.375,0) E4(0.375,0) E5(1.125,0) E6(1.875,0) F1(-1.875,-0.75) F2(-1.125,-0.75) F3(-0.375,-0.75) F4(0.375,-0.75) F5(1.125,-0.75) F6(1.875,-0.75) G1(-1.875,-1.5) G2(-1.125,-1.5) G3(-0.375,-1.5) G4(0.375,-1.5) G5(1.125,-1.5) G6(1.875,-1.5) H1(-1.875,-2.25) H2(-1.125,-2.25) H3(-0.375,-2.25) H4(0.375,-2.25) H5(1.125,-2.25) H6(1.875,-2.25) J1(-1.875,-3) J2(-1.125,-3) J3(-0.375,-3) J4(0.375,-3) J5(1.125,-3) J6(1.875,-3)
  silkscreen extent -4.78,-5 4,5, body extent -4,-5 4,5, height 0.7
BGA100P22X22-484N [mm] "484-Ball Fine Pitch Plastic Ball Grid Array (FG484) - Fully Populated"
  round 0.5 smd: A1(-10.5,10.5) A2(-9.5,10.5) A3(-8.5,10.5) A4(-7.5,10.5) A5(-6.5,10.5) A6(-5.5,10.5) A7(-4.5,10.5) A8(-3.5,10.5) A9(-2.5,10.5) A10(-1.5,10.5) A11(-0.5,10.5) A12(0.5,10.5) A13(1.5,10.5) A14(2.5,10.5) A15(3.5,10.5) A16(4.5,10.5) A17(5.5,10.5) A18(6.5,10.5) A19(7.5,10.5) A20(8.5,10.5) A21(9.5,10.5) A22(10.5,10.5) AA1(-10.5,-9.5) AA2(-9.5,-9.5) AA3(-8.5,-9.5) AA4(-7.5,-9.5) AA5(-6.5,-9.5) AA6(-5.5,-9.5) AA7(-4.5,-9.5) AA8(-3.5,-9.5) AA9(-2.5,-9.5) AA10(-1.5,-9.5) AA11(-0.5,-9.5) AA12(0.5,-9.5) AA13(1.5,-9.5) AA14(2.5,-9.5) AA15(3.5,-9.5) AA16(4.5,-9.5) AA17(5.5,-9.5) AA18(6.5,-9.5) AA19(7.5,-9.5) AA20(8.5,-9.5) AA21(9.5,-9.5) AA22(10.5,-9.5) AB1(-10.5,-10.5) AB2(-9.5,-10.5) AB3(-8.5,-10.5) AB4(-7.5,-10.5) AB5(-6.5,-10.5) AB6(-5.5,-10.5) AB7(-4.5,-10.5) AB8(-3.5,-10.5) AB9(-2.5,-10.5) AB10(-1.5,-10.5) AB11(-0.5,-10.5) AB12(0.5,-10.5) AB13(1.5,-10.5) AB14(2.5,-10.5) AB15(3.5,-10.5) AB16(4.5,-10.5) AB17(5.5,-10.5) AB18(6.5,-10.5) AB19(7.5,-10.5) AB20(8.5,-10.5) AB21(9.5,-10.5) AB22(10.5,-10.5) B1(-10.5,9.5) B2(-9.5,9.5) B3(-8.5,9.5) B4(-7.5,9.5) B5(-6.5,9.5) B6(-5.5,9.5) B7(-4.5,9.5) B8(-3.5,9.5) B9(-2.5,9.5) B10(-1.5,9.5) B11(-0.5,9.5) B12(0.5,9.5) B13(1.5,9.5) B14(2.5,9.5) B15(3.5,9.5) B16(4.5,9.5) B17(5.5,9.5) B18(6.5,9.5) B19(7.5,9.5) B20(8.5,9.5) B21(9.5,9.5) B22(10.5,9.5) C1(-10.5,8.5) C2(-9.5,8.5) C3(-8.5,8.5) C4(-7.5,8.5) C5(-6.5,8.5) C6(-5.5,8.5) C7(-4.5,8.5) C8(-3.5,8.5) C9(-2.5,8.5) C10(-1.5,8.5) C11(-0.5,8.5) C12(0.5,8.5) C13(1.5,8.5) C14(2.5,8.5) C15(3.5,8.5) C16(4.5,8.5) C17(5.5,8.5) C18(6.5,8.5) C19(7.5,8.5) C20(8.5,8.5) C21(9.5,8.5) C22(10.5,8.5) D1(-10.5,7.5) D2(-9.5,7.5) D3(-8.5,7.5) D4(-7.5,7.5) D5(-6.5,7.5) D6(-5.5,7.5) D7(-4.5,7.5) D8(-3.5,7.5) D9(-2.5,7.5) D10(-1.5,7.5) D11(-0.5,7.5) D12(0.5,7.5) D13(1.5,7.5) D14(2.5,7.5) D15(3.5,7.5) D16(4.5,7.5) D17(5.5,7.5) D18(6.5,7.5) D19(7.5,7.5) D20(8.5,7.5) D21(9.5,7.5) D22(10.5,7.5) E1(-10.5,6.5) E2(-9.5,6.5) E3(-8.5,6.5) E4(-7.5,6.5) E5(-6.5,6.5) E6(-5.5,6.5) E7(-4.5,6.5) E8(-3.5,6.5) E9(-2.5,6.5) E10(-1.5,6.5) E11(-0.5,6.5) E12(0.5,6.5) E13(1.5,6.5) E14(2.5,6.5) E15(3.5,6.5) E16(4.5,6.5) E17(5.5,6.5) E18(6.5,6.5) E19(7.5,6.5) E20(8.5,6.5) E21(9.5,6.5) E22(10.5,6.5) F1(-10.5,5.5) F2(-9.5,5.5) F3(-8.5,5.5) F4(-7.5,5.5) F5(-6.5,5.5) F6(-5.5,5.5) F7(-4.5,5.5) F8(-3.5,5.5) F9(-2.5,5.5) F10(-1.5,5.5) F11(-0.5,5.5) F12(0.5,5.5) F13(1.5,5.5) F14(2.5,5.5) F15(3.5,5.5) F16(4.5,5.5) F17(5.5,5.5) F18(6.5,5.5) F19(7.5,5.5) F20(8.5,5.5) F21(9.5,5.5) F22(10.5,5.5) G1(-10.5,4.5) G2(-9.5,4.5) G3(-8.5,4.5) G4(-7.5,4.5) G5(-6.5,4.5) G6(-5.5,4.5) G7(-4.5,4.5) G8(-3.5,4.5) G9(-2.5,4.5) G10(-1.5,4.5) G11(-0.5,4.5) G12(0.5,4.5) G13(1.5,4.5) G14(2.5,4.5) G15(3.5,4.5) G16(4.5,4.5) G17(5.5,4.5) G18(6.5,4.5) G19(7.5,4.5) G20(8.5,4.5) G21(9.5,4.5) G22(10.5,4.5) H1(-10.5,3.5) H2(-9.5,3.5) H3(-8.5,3.5) H4(-7.5,3.5) H5(-6.5,3.5) H6(-5.5,3.5) H7(-4.5,3.5) H8(-3.5,3.5) H9(-2.5,3.5) H10(-1.5,3.5) H11(-0.5,3.5) H12(0.5,3.5) H13(1.5,3.5) H14(2.5,3.5) H15(3.5,3.5) H16(4.5,3.5) H17(5.5,3.5) H18(6.5,3.5) H19(7.5,3.5) H20(8.5,3.5) H21(9.5,3.5) H22(10.5,3.5) J1(-10.5,2.5) J2(-9.5,2.5) J3(-8.5,2.5) J4(-7.5,2.5) J5(-6.5,2.5) J6(-5.5,2.5) J7(-4.5,2.5) J8(-3.5,2.5) J9(-2.5,2.5) J10(-1.5,2.5) J11(-0.5,2.5) J12(0.5,2.5) J13(1.5,2.5) J14(2.5,2.5) J15(3.5,2.5) J16(4.5,2.5) J17(5.5,2.5) J18(6.5,2.5) J19(7.5,2.5) J20(8.5,2.5) J21(9.5,2.5) J22(10.5,2.5) K1(-10.5,1.5) K2(-9.5,1.5) K3(-8.5,1.5) K4(-7.5,1.5) K5(-6.5,1.5) K6(-5.5,1.5) K7(-4.5,1.5) K8(-3.5,1.5) K9(-2.5,1.5) K10(-1.5,1.5) K11(-0.5,1.5) K12(0.5,1.5) K13(1.5,1.5) K14(2.5,1.5) K15(3.5,1.5) K16(4.5,1.5) K17(5.5,1.5) K18(6.5,1.5) K19(7.5,1.5) K20(8.5,1.5) K21(9.5,1.5) K22(10.5,1.5) L1(-10.5,0.5) L2(-9.5,0.5) L3(-8.5,0.5) L4(-7.5,0.5) L5(-6.5,0.5) L6(-5.5,0.5) L7(-4.5,0.5) L8(-3.5,0.5) L9(-2.5,0.5) L10(-1.5,0.5) L11(-0.5,0.5) L12(0.5,0.5) L13(1.5,0.5) L14(2.5,0.5) L15(3.5,0.5) L16(4.5,0.5) L17(5.5,0.5) L18(6.5,0.5) L19(7.5,0.5) L20(8.5,0.5) L21(9.5,0.5) L22(10.5,0.5) M1(-10.5,-0.5) M2(-9.5,-0.5) M3(-8.5,-0.5) M4(-7.5,-0.5) M5(-6.5,-0.5) M6(-5.5,-0.5) M7(-4.5,-0.5) M8(-3.5,-0.5) M9(-2.5,-0.5) M10(-1.5,-0.5) M11(-0.5,-0.5) M12(0.5,-0.5) M13(1.5,-0.5) M14(2.5,-0.5) M15(3.5,-0.5) M16(4.5,-0.5) M17(5.5,-0.5) M18(6.5,-0.5) M19(7.5,-0.5) M20(8.5,-0.5) M21(9.5,-0.5) M22(10.5,-0.5) N1(-10.5,-1.5) N2(-9.5,-1.5) N3(-8.5,-1.5) N4(-7.5,-1.5) N5(-6.5,-1.5) N6(-5.5,-1.5) N7(-4.5,-1.5) N8(-3.5,-1.5) N9(-2.5,-1.5) N10(-1.5,-1.5) N11(-0.5,-1.5) N12(0.5,-1.5) N13(1.5,-1.5) N14(2.5,-1.5) N15(3.5,-1.5) N16(4.5,-1.5) N17(5.5,-1.5) N18(6.5,-1.5) N19(7.5,-1.5) N20(8.5,-1.5) N21(9.5,-1.5) N22(10.5,-1.5) P1(-10.5,-2.5) P2(-9.5,-2.5) P3(-8.5,-2.5) P4(-7.5,-2.5) P5(-6.5,-2.5) P6(-5.5,-2.5) P7(-4.5,-2.5) P8(-3.5,-2.5) P9(-2.5,-2.5) P10(-1.5,-2.5) P11(-0.5,-2.5) P12(0.5,-2.5) P13(1.5,-2.5) P14(2.5,-2.5) P15(3.5,-2.5) P16(4.5,-2.5) P17(5.5,-2.5) P18(6.5,-2.5) P19(7.5,-2.5) P20(8.5,-2.5) P21(9.5,-2.5) P22(10.5,-2.5) R1(-10.5,-3.5) R2(-9.5,-3.5) R3(-8.5,-3.5) R4(-7.5,-3.5) R5(-6.5,-3.5) R6(-5.5,-3.5) R7(-4.5,-3.5) R8(-3.5,-3.5) R9(-2.5,-3.5) R10(-1.5,-3.5) R11(-0.5,-3.5) R12(0.5,-3.5) R13(1.5,-3.5) R14(2.5,-3.5) R15(3.5,-3.5) R16(4.5,-3.5) R17(5.5,-3.5) R18(6.5,-3.5) R19(7.5,-3.5) R20(8.5,-3.5) R21(9.5,-3.5) R22(10.5,-3.5) T1(-10.5,-4.5) T2(-9.5,-4.5) T3(-8.5,-4.5) T4(-7.5,-4.5) T5(-6.5,-4.5) T6(-5.5,-4.5) T7(-4.5,-4.5) T8(-3.5,-4.5) T9(-2.5,-4.5) T10(-1.5,-4.5) T11(-0.5,-4.5) T12(0.5,-4.5) T13(1.5,-4.5) T14(2.5,-4.5) T15(3.5,-4.5) T16(4.5,-4.5) T17(5.5,-4.5) T18(6.5,-4.5) T19(7.5,-4.5) T20(8.5,-4.5) T21(9.5,-4.5) T22(10.5,-4.5) U1(-10.5,-5.5) U2(-9.5,-5.5) U3(-8.5,-5.5) U4(-7.5,-5.5) U5(-6.5,-5.5) U6(-5.5,-5.5) U7(-4.5,-5.5) U8(-3.5,-5.5) U9(-2.5,-5.5) U10(-1.5,-5.5) U11(-0.5,-5.5) U12(0.5,-5.5) U13(1.5,-5.5) U14(2.5,-5.5) U15(3.5,-5.5) U16(4.5,-5.5) U17(5.5,-5.5) U18(6.5,-5.5) U19(7.5,-5.5) U20(8.5,-5.5) U21(9.5,-5.5) U22(10.5,-5.5) V1(-10.5,-6.5) V2(-9.5,-6.5) V3(-8.5,-6.5) V4(-7.5,-6.5) V5(-6.5,-6.5) V6(-5.5,-6.5) V7(-4.5,-6.5) V8(-3.5,-6.5) V9(-2.5,-6.5) V10(-1.5,-6.5) V11(-0.5,-6.5) V12(0.5,-6.5) V13(1.5,-6.5) V14(2.5,-6.5) V15(3.5,-6.5) V16(4.5,-6.5) V17(5.5,-6.5) V18(6.5,-6.5) V19(7.5,-6.5) V20(8.5,-6.5) V21(9.5,-6.5) V22(10.5,-6.5) W1(-10.5,-7.5) W2(-9.5,-7.5) W3(-8.5,-7.5) W4(-7.5,-7.5) W5(-6.5,-7.5) W6(-5.5,-7.5) W7(-4.5,-7.5) W8(-3.5,-7.5) W9(-2.5,-7.5) W10(-1.5,-7.5) W11(-0.5,-7.5) W12(0.5,-7.5) W13(1.5,-7.5) W14(2.5,-7.5) W15(3.5,-7.5) W16(4.5,-7.5) W17(5.5,-7.5) W18(6.5,-7.5) W19(7.5,-7.5) W20(8.5,-7.5) W21(9.5,-7.5) W22(10.5,-7.5) Y1(-10.5,-8.5) Y2(-9.5,-8.5) Y3(-8.5,-8.5) Y4(-7.5,-8.5) Y5(-6.5,-8.5) Y6(-5.5,-8.5) Y7(-4.5,-8.5) Y8(-3.5,-8.5) Y9(-2.5,-8.5) Y10(-1.5,-8.5) Y11(-0.5,-8.5) Y12(0.5,-8.5) Y13(1.5,-8.5) Y14(2.5,-8.5) Y15(3.5,-8.5) Y16(4.5,-8.5) Y17(5.5,-8.5) Y18(6.5,-8.5) Y19(7.5,-8.5) Y20(8.5,-8.5) Y21(9.5,-8.5) Y22(10.5,-8.5)
  silkscreen extent -12.27,-11.5 11.5,11.5, body extent -11.2,-11.22 11.22,11.2, height 2
C0805 [mm] "Chip Capacitor, Body 2.0x1.3mm, IPC High Density"
  rect 1.1x1.4 smd: 1(-0.75,0) 2(0.75,0)
  body extent -1.1,-0.72 1.1,0.72, height 1.4
C1210 [mm] "Chip Capacitor, Body 3.2x2.5mm, IPC High Density"
  rect 1.1x2.6 smd: 1(-1.35,0) 2(1.35,0)
  silkscreen extent -0.4,-1.2 0.4,1.2, body extent -1.7,-1.35 1.7,1.35, height 1.3
CB3_CB3LV [mm] "CBS Crystal"
  rect 1.8x2 smd: 1(-2.54,-2.1) 2(2.54,-2.1) 3(2.54,2.1) 4(-2.54,2.1)
  silkscreen extent -3.86,-2.6 3.75,2.6, body extent -3.25,-2.88 3.25,2.88, height 1.5
CX-2520SB [mm]
  rect 1.2x1 smd: 1(-0.85,-0.65) 2(0.85,-0.65) 3(0.85,0.65) 4(-0.85,0.65)
  silkscreen extent -1.75,-1.07 1.43,1.1, body extent -1.25,-1 1.25,1, height 0.45
"EVQPA PB" [mm] "Panasonic EVQPA Switch"
  round 1.6 hole 1: 1(-3.25,2.25) 2(-3.25,-2.25) 3(3.25,2.25) 4(3.25,-2.25)
  silkscreen extent -2.25,-1.5 2.25,1.5, body extent -3.5,-3 3.5,3, height 2.5
FLAT-PAC [mm]
  rect 4.5x2.5 smd: 1(0,-2.5) 2(0,2.5)
  silkscreen extent -2.5,-4 2.5,4, body extent -1.95,-3.49 1.95,3.49, height 1
HDR1X2 [mm] "Connector; Header; 2 Position"
  rect 1.5x1.5 hole 0.9: 1(0,0)
  round 1.5 hole 0.9: 2(2.54,0)
  silkscreen extent -1.27,-1.27 3.81,1.27
HDR1X3 [mm] "Connector; Header; 3 Position"
  rect 1.5x1.5 hole 0.9: 1(0,0)
  round 1.5 hole 0.9: 2(2.54,0) 3(5.08,0)
  silkscreen extent -1.27,-1.27 6.35,1.27
HDR2X4 [mm] "Connector; Header; 4x2 Position"
  rect 1.5x1.5 hole 0.9: 1(0,0)
  round 1.5 hole 0.9: 2(0,2.54) 3(2.54,0) 4(2.54,2.54) 5(5.08,0) 6(5.08,2.54) 7(7.62,0) 8(7.62,2.54)
  silkscreen extent -1.27,-1.27 8.89,3.81
HDR2X6 [mm] "Connector; Header; 6x2 Position"
  rect 1.5x1.5 hole 0.9: 1(0,0)
  round 1.5 hole 0.9: 2(0,2.54) 3(2.54,0) 4(2.54,2.54) 5(5.08,0) 6(5.08,2.54) 7(7.62,0) 8(7.62,2.54) 9(10.16,0) 10(10.16,2.54) 11(12.7,0) 12(12.7,2.54)
  silkscreen extent -1.27,-1.27 13.97,3.81
HDR2X8 [mm] "Connector; Header; 8x2 Position"
  rect 1.5x1.5 hole 0.9: 1(0,0)
  round 1.5 hole 0.9: 2(0,2.54) 3(2.54,0) 4(2.54,2.54) 5(5.08,0) 6(5.08,2.54) 7(7.62,0) 8(7.62,2.54) 9(10.16,0) 10(10.16,2.54) 11(12.7,0) 12(12.7,2.54) 13(15.24,0) 14(15.24,2.54) 15(17.78,0) 16(17.78,2.54)
  silkscreen extent -1.27,-1.27 19.05,3.81
HHM1520A2 [mm] "TDK chip balun"
  rect 0.8x0.3 smd: 1(-0.7,0.65) 2(-0.7,0) 3(-0.7,-0.65) 4(0.7,-0.65) 5(0.7,0) 6(0.7,0.65)
  silkscreen extent -0.65,-1 0.65,1, body extent -0.77,-1 0.77,1, height 1.5
J1-0603 [mm] "Chip Resistor, Body 1.6x0.8mm, IPC High Density"
  rect 0.7x0.9 smd: 1(-0.75,0) 2(0.75,0)
  silkscreen extent -0.2,-0.35 0.2,0.35, body extent -0.85,-0.48 0.85,0.48, height 0.9
KSC403 [mm] "KSC403 Series switch"
  rect 2.8x1 smd: 1(-2.9,2) 2(-2.9,-2) 3(2.9,2) 4(2.9,-2)
  silkscreen extent -4.5,-2.75 4.52,2.75, body extent -2.73,-2.5 2.75,2.5, height 6
"Mini USB" [mm]
  rect 2.25x0.5 smd: 1(0,1.6) 2(0,0.8) 3(0,0) 4(0,-0.8) 5(0,-1.6)
  rect 4x2.05 smd: 6(-4.25,-4.925) 6(-4.25,4.925) 6(0,-4.925) 6(0,4.925)
  silkscreen extent -6.25,-3.62 2,3.62
PJ-102AH [mm] "Power Jack"
  rect 2.2x2.2 hole 1.6 square: 1(0,-3) 2(0,3) 3(-4.7,0)
  silkscreen extent -6,-4.3 4.3,10.7, body extent -5.75,-3.99 4.08,10.89, height 10
SMA_SMD [mm]
  rect 0.6x2.5 smd: 1(0,1.125)
  rect 2x5.5 smd: 2(-4.25,-0.375) 2(4.25,-0.375)
  rect 2x5.5 smd far side: 2(-4.25,-0.375) 2(4.25,-0.375)
  silkscreen extent -3,-3 3,2.37, body extent -5.13,-2.25 5.13,9, height 4
"SMT Al Cap." [mm] "Panasonic SMT Al Cap. Series:S Type:V,  Size code:G"
  rect 1.25x4.9 smd: +(0,-4.05) -(0,4.05)
  silkscreen extent -5.15,-5.15 5.15,5.15, body extent -5.1,-5.1 5.1,5.1, height 10.5
SOIC127P600X175-8N [mm] "SOIC, 8-Leads, Body 5.0x4.0mm (max), Pitch 1.27mm, IPC Medium Density"
  oval 2.2x0.6 smd: 1(-2.4,1.905) 2(-2.4,0.635) 3(-2.4,-0.635) 4(-2.4,-1.905) 5(2.4,-1.905) 6(2.4,-0.635) 7(2.4,0.635) 8(2.4,1.905)
  silkscreen extent -2.52,-2.5 0.9,2.88, body extent -2,-2.5 2,2.5, height 1.75
SOIC127P1030X265-20N [mm] "SOIC, 20-Leads, Body 13.0x7.6mm (max), Pitch 1.27mm, IPC Medium Density"
  oval 2.15x0.6 smd: 1(-4.65,5.715) 2(-4.65,4.445) 3(-4.65,3.175) 4(-4.65,1.905) 5(-4.65,0.635) 6(-4.65,-0.635) 7(-4.65,-1.905) 8(-4.65,-3.175) 9(-4.65,-4.445) 10(-4.65,-5.715) 11(4.65,-5.715) 12(4.65,-4.445) 13(4.65,-3.175) 14(4.65,-1.905) 15(4.65,-0.635) 16(4.65,0.635) 17(4.65,1.905) 18(4.65,3.175) 19(4.65,4.445) 20(4.65,5.715)
  silkscreen extent -4.77,-6.5 3.17,6.69, body extent -3.8,-6.5 3.8,6.5, height 2.65
SOP63P600X173-28N [mm] "SOP, 28-Leads, Body 10.0x4.0mm (max), Pitch 0.63mm, IPC Medium Density"
  oval 1.8x0.35 smd: 1(-2.6,4.127) 2(-2.6,3.492) 3(-2.6,2.857) 4(-2.6,2.222) 5(-2.6,1.587) 6(-2.6,0.953) 7(-2.6,0.318) 8(-2.6,-0.318) 9(-2.6,-0.953) 10(-2.6,-1.587) 11(-2.6,-2.222) 12(-2.6,-2.857) 13(-2.6,-3.492) 14(-2.6,-4.127) 15(2.6,-4.127) 16(2.6,-3.492) 17(2.6,-2.857) 18(2.6,-2.222) 19(2.6,-1.587) 20(2.6,-0.953) 21(2.6,-0.318) 22(2.6,0.318) 23(2.6,0.953) 24(2.6,1.587) 25(2.6,2.222) 26(2.6,2.857) 27(2.6,3.492) 28(2.6,4.127)
  silkscreen extent -2.72,-5 1.3,5, body extent -1.99,-4.99 1.99,4.99, height 1.73
SOT23-3N [mm] "SOT23, 3-Leads, Body 2.9x1.3mm, Pitch 0.95mm, Lead Span 2.5mm, IPC Medium Density"
  rect 1.5x0.6 smd: 1(-0.95,0.95) 2(-0.95,-0.95) 3(0.95,0)
  silkscreen extent -1.07,-1.5 0.7,1.92, body extent -0.7,-1.5 0.7,1.5, height 1.1
SOT23-5 [mm] "SOT23, 5-Leads, Body 2.9x1.6mm, Pitch 0.95mm, Lead Span 2.8mm, IPC High Density"
  rect 1.3x0.55 smd: 1(-1.25,0.95) 2(-1.25,0) 3(-1.25,-0.95) 4(1.25,-0.95) 5(1.25,0.95)
  silkscreen extent -1.17,-1.55 0.35,1.77, body extent -0.67,-1.5 0.65,1.5, height 1.45
SOT23-6 [mm] "SOT23, 6-Leads, Body 2.8x2.6mm (max), Pitch 0.95mm, IPC Medium Density"
  rect 1.1x0.55 smd: 1(-1,0.95) 2(-1,0) 3(-1,-0.95) 4(1,-0.95) 5(1,0) 6(1,0.95)
  silkscreen extent -1.12,-1.4 0.05,1.9, body extent -0.83,-1.42 0.83,1.43, height 1.22
SOT223-4L [mil] "SOT223, 4-Leads, Body 6.5x3.5mm, Pitch 2.3mm, Lead Span 7mm, IPC High Density"
  rect 59x39 smd: 1(-124,90) 2(-124,0) 3(-124,-90)
  rect 59x129 smd: 4(124,0)
  silkscreen extent -117,-132 65,135, body extent -73,-132 73,132, height 71
SOT353-5N [mm] "SOT353, 5-Leads, Body 2x1.3mm, Pitch 0.65mm, Lead Span 2.1mm, IPC Medium Density"
  rect 0.85x0.4 smd: 1(-0.95,0.65) 2(-0.95,0) 3(-0.95,-0.65) 4(0.95,-0.65) 5(0.95,0.65)
  silkscreen extent -1.07,-1.1 0.15,1.52, body extent -0.7,-1.1 0.7,1.1, height 1.1
SOT363-6N [mm] "SOT363, 6-Leads, Body 2x1.3mm, Pitch 0.65mm, Lead Span 2.1mm, IPC Medium Density"
  rect 0.85x0.4 smd: 1(-0.95,0.65) 2(-0.95,0) 3(-0.95,-0.65) 4(0.95,-0.65) 5(0.95,0) 6(0.95,0.65)
  silkscreen extent -1.07,-1.1 0.15,1.52, body extent -0.7,-1.1 0.7,1.1, height 1
SSOP65P780X200-28N [mm] "SSOP, 28-Leads, Body 10.3x5.6mm (max), Pitch 0.65mm, IPC Medium Density"
  rect 2.1x0.45 smd: 1(-3.425,4.225)
  oval 2.1x0.45 smd: 2(-3.425,3.575) 3(-3.425,2.925) 4(-3.425,2.275) 5(-3.425,1.625) 6(-3.425,0.975) 7(-3.425,0.325) 8(-3.425,-0.325) 9(-3.425,-0.975) 10(-3.425,-1.625) 11(-3.425,-2.275) 12(-3.425,-2.925) 13(-3.425,-3.575) 14(-3.425,-4.225) 15(3.425,-4.225) 16(3.425,-3.575) 17(3.425,-2.925) 18(3.425,-2.275) 19(3.425,-1.625) 20(3.425,-0.975) 21(3.425,-0.325) 22(3.425,0.325) 23(3.425,0.975) 24(3.425,1.625) 25(3.425,2.275) 26(3.425,2.925) 27(3.425,3.575) 28(3.425,4.225)
  silkscreen extent -3.55,-5.15 1.97,5.15, body extent -2.8,-5.17 2.8,5.17, height 2
STS1400PC04 [mm] "Slide Switch 4 pos"
  round 1.25 hole 0.89: 1(0,0) 2(2.48,0) 3(7.48,0) 4(9.96,0) 5(12.44,0)
  silkscreen extent -4,-3.05 13.94,3.05, body extent -4,-3 13.9,3, height 9.21
TestPoint [mm]
  round 1.4 hole 1: 1(0,0)
TQFN-48 [mm]
  rect 0.75x0.3 smd: 1(-3.425,2.75) 12(-3.425,-2.75) 25(3.425,-2.75) 36(3.425,2.75)
  rect 0.85x0.3 smd: 2(-3.375,2.25) 3(-3.375,1.75) 4(-3.375,1.25) 5(-3.375,0.75) 6(-3.375,0.25) 7(-3.375,-0.25) 8(-3.375,-0.75) 9(-3.375,-1.25) 10(-3.375,-1.75) 11(-3.375,-2.25) 26(3.375,-2.25) 27(3.375,-1.75) 28(3.375,-1.25) 29(3.375,-0.75) 30(3.375,-0.25) 31(3.375,0.25) 32(3.375,0.75) 33(3.375,1.25) 34(3.375,1.75) 35(3.375,2.25)
  rect 0.3x0.75 smd: 13(-2.75,-3.425) 24(2.75,-3.425) 37(2.75,3.425) 48(-2.75,3.425)
  rect 0.3x0.85 smd: 14(-2.25,-3.375) 15(-1.75,-3.375) 16(-1.25,-3.375) 17(-0.75,-3.375) 18(-0.25,-3.375) 19(0.25,-3.375) 20(0.75,-3.375) 21(1.25,-3.375) 22(1.75,-3.375) 23(2.25,-3.375) 38(2.25,3.375) 39(1.75,3.375) 40(1.25,3.375) 41(0.75,3.375) 42(0.25,3.375) 43(-0.25,3.375) 44(-0.75,3.375) 45(-1.25,3.375) 46(-1.75,3.375) 47(-2.25,3.375)
  rect 5.4x5.4 smd: 49(0,0)
  silkscreen extent -3.96,-3.5 3.5,3.5, body extent -3.62,-3.62 3.62,3.62, height 1
TSQFP50P900X900X160-48N [mm] "TSQFP, 48-Leads, Body 9.0x9.0mm (max), Pitch 0.50mm, IPC Medium Density"
  oval 1.65x0.3 smd: 1(-4.075,2.75) 2(-4.075,2.25) 3(-4.075,1.75) 4(-4.075,1.25) 5(-4.075,0.75) 6(-4.075,0.25) 7(-4.075,-0.25) 8(-4.075,-0.75) 9(-4.075,-1.25) 10(-4.075,-1.75) 11(-4.075,-2.25) 12(-4.075,-2.75) 25(4.075,-2.75) 26(4.075,-2.25) 27(4.075,-1.75) 28(4.075,-1.25) 29(4.075,-0.75) 30(4.075,-0.25) 31(4.075,0.25) 32(4.075,0.75) 33(4.075,1.25) 34(4.075,1.75) 35(4.075,2.25) 36(4.075,2.75)
  oval 0.3x1.65 smd: 13(-2.75,-4.075) 14(-2.25,-4.075) 15(-1.75,-4.075) 16(-1.25,-4.075) 17(-0.75,-4.075) 18(-0.25,-4.075) 19(0.25,-4.075) 20(0.75,-4.075) 21(1.25,-4.075) 22(1.75,-4.075) 23(2.25,-4.075) 24(2.75,-4.075) 37(2.75,4.075) 38(2.25,4.075) 39(1.75,4.075) 40(1.25,4.075) 41(0.75,4.075) 42(0.25,4.075) 43(-0.25,4.075) 44(-0.75,4.075) 45(-1.25,4.075) 46(-1.75,4.075) 47(-2.25,4.075) 48(-2.75,4.075)
  silkscreen extent -4.2,-2.85 2.85,3.57, body extent -3.5,-3.5 3.5,3.5, height 1.6
TSSOP50P2000X120-56N [mm] "TSSOP, 56-Leads, Body 14.1x18.5mm (max), Pitch 0.50mm, IPC Medium Density"
  oval 1.7x0.3 smd: 1(-9.8,6.75) 2(-9.8,6.25) 3(-9.8,5.75) 4(-9.8,5.25) 5(-9.8,4.75) 6(-9.8,4.25) 7(-9.8,3.75) 8(-9.8,3.25) 9(-9.8,2.75) 10(-9.8,2.25) 11(-9.8,1.75) 12(-9.8,1.25) 13(-9.8,0.75) 14(-9.8,0.25) 15(-9.8,-0.25) 16(-9.8,-0.75) 17(-9.8,-1.25) 18(-9.8,-1.75) 19(-9.8,-2.25) 20(-9.8,-2.75) 21(-9.8,-3.25) 22(-9.8,-3.75) 23(-9.8,-4.25) 24(-9.8,-4.75) 25(-9.8,-5.25) 26(-9.8,-5.75) 27(-9.8,-6.25) 28(-9.8,-6.75) 29(9.8,-6.75) 30(9.8,-6.25) 31(9.8,-5.75) 32(9.8,-5.25) 33(9.8,-4.75) 34(9.8,-4.25) 35(9.8,-3.75) 36(9.8,-3.25) 37(9.8,-2.75) 38(9.8,-2.25) 39(9.8,-1.75) 40(9.8,-1.25) 41(9.8,-0.75) 42(9.8,-0.25) 43(9.8,0.25) 44(9.8,0.75) 45(9.8,1.25) 46(9.8,1.75) 47(9.8,2.25) 48(9.8,2.75) 49(9.8,3.25) 50(9.8,3.75) 51(9.8,4.25) 52(9.8,4.75) 53(9.8,5.25) 54(9.8,5.75) 55(9.8,6.25) 56(9.8,6.75)
  silkscreen extent -9.93,-7.05 8.55,7.57, body extent -9.25,-7.05 9.25,7.05, height 1.2